# Altium PCB EVB_PHY_SR8201F_V1.0.0.PcbDoc (part 2 of 2)
Units mil, origin at the board's own origin, x right, y up, seen from the top; angles counter-clockwise.
Board outline 6000 x 4000 mil, 4 copper layers (Top, L2, L3, Bottom), stack 35.4 mil thick; 66 components, 60 nets, 233 pads, 178 vias.
Unrouted connection lines stored in the file: 129.
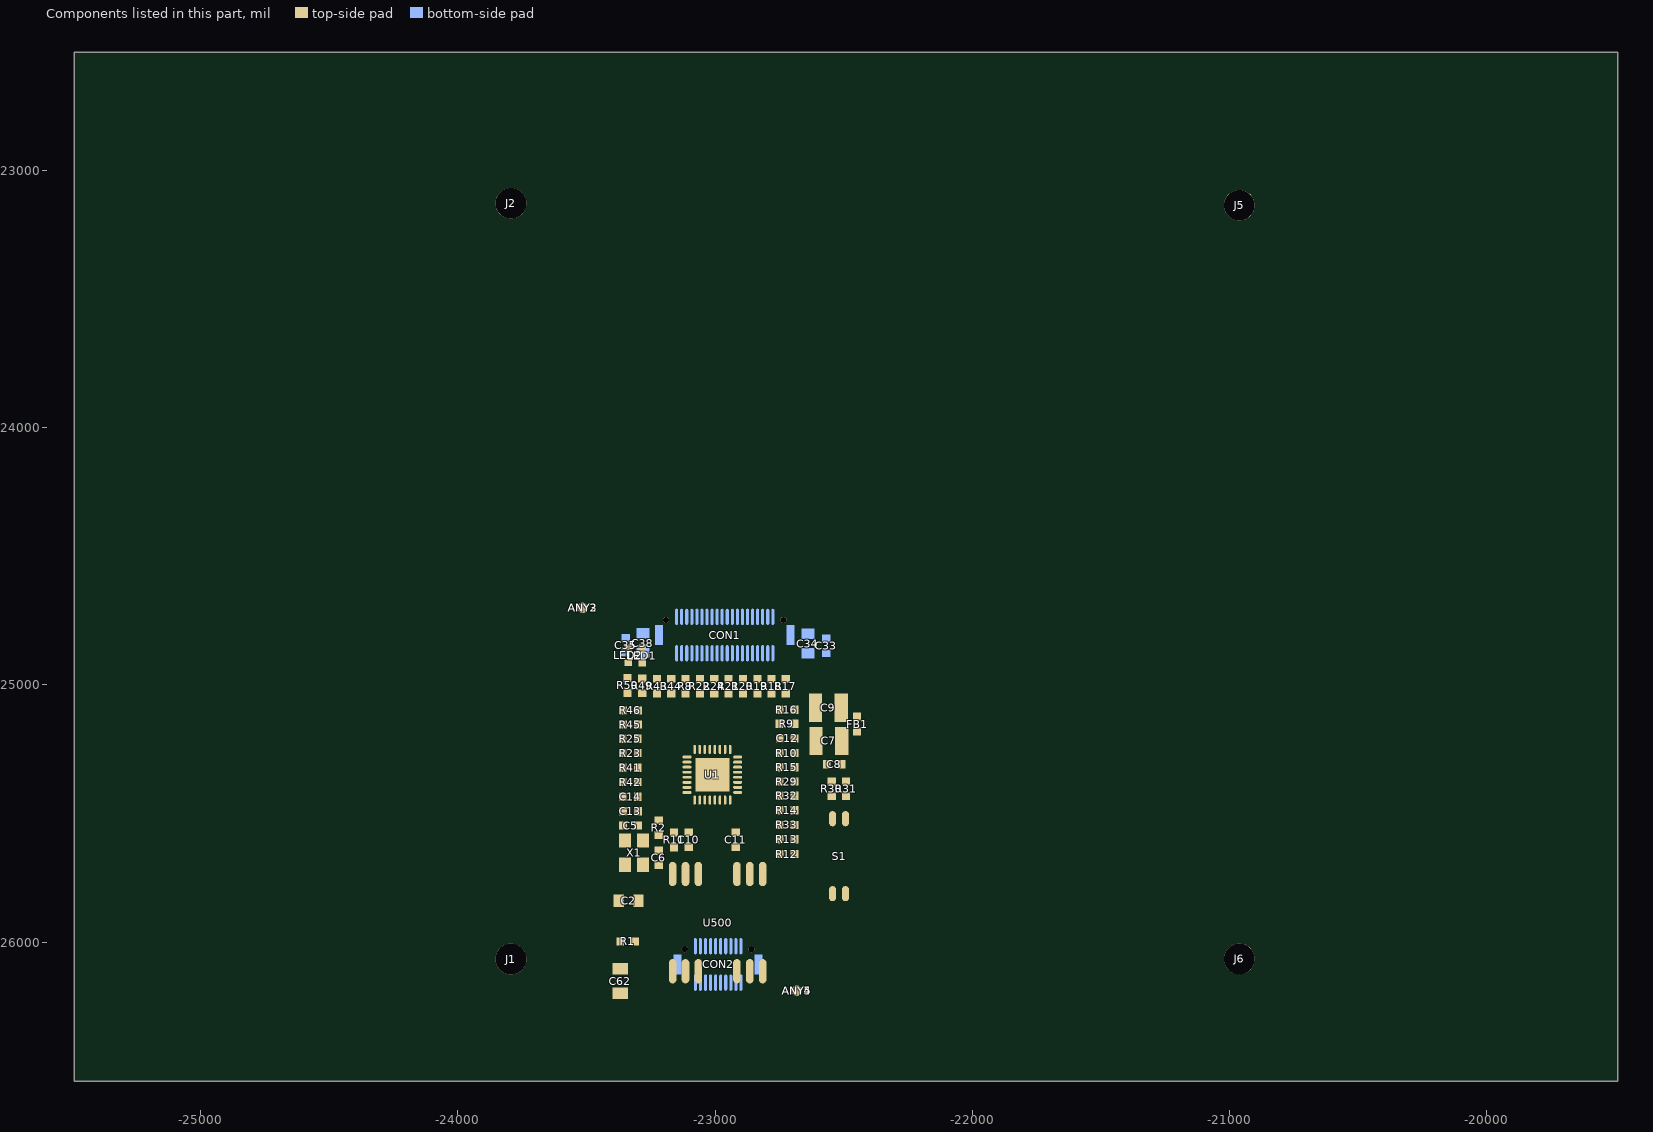
[diagram p4: the components of this part, seen from the top]

## Via types
v1: diameter 16, hole 8, Top to Bottom, 177 vias
v2: diameter 24, hole 16, Top to Bottom, 1 vias

## Nets (pads, with @x,y where several pads share a name; then routed paths per layer and width w, separated by ;. In a path a pad name is that pad's centre, name@x,y a point inside that pad or via, vN(x,y) a via of type N, cw(c..) or ccw(c..) an arc to the next point about the centre after c; other vN are vias at no path point) (continued)
copper on no net: | length 28971
  Top w2: -23690.5,-25160 -23690.5,-25102 ; -23689.5,-25162 -23689.5,-25100 ; -23687.5,-25162 -23687.5,-25100 ; -23684.5,-25158 -23684.5,-25103 ; -23680.5,-25155 -23680.5,-25107 ; -23679.5,-25447 -23679.5,-25435 ; -23679.5,-25350 -23679.5,-25328 ; -23679.5,-25238 -23679.5,-25223 ; -23679.5,-25203 -23679.5,-25178 ; -23679.5,-25153 -23679.5,-25108 ; -23679.5,-25083 -23679.5,-25058 ; -23679.5,-24832 -23679.5,-24820 ; -23677.5,-25452 -23677.5,-25430 ; -23677.5,-25355 -23677.5,-25320 ; -23677.5,-25245 -23677.5,-25220 ; -23677.5,-25205 -23677.5,-25170 ; -23677.5,-25092 -23677.5,-25057 ; -23677.5,-25043 -23677.5,-25017 ; -23677.5,-24937 -23677.5,-24910 ; -23677.5,-24837 -23677.5,-24815 ; -23675.5,-25452 -23675.5,-25430 ; -23675.5,-25357 -23675.5,-25317 ; -23675.5,-25247 -23675.5,-25217 ; -23675.5,-25207 -23675.5,-25170 ; -23675.5,-25150 -23675.5,-25112 ; -23675.5,-25093 -23675.5,-25055 ; -23675.5,-25045 -23675.5,-25015 ; -23675.5,-24940 -23675.5,-24908 ; -23675.5,-24837 -23675.5,-24815 ; -23674.5,-25455 -23674.5,-25427 ; -23674.5,-25358 -23674.5,-25315 ; -23674.5,-25247 -23674.5,-25215 ; -23674.5,-25207 -23674.5,-25167 ; -23674.5,-25095 -23674.5,-25057 ; -23674.5,-25045 -23674.5,-25015 ; -23674.5,-24943 -23674.5,-24910 ; -23674.5,-24840 -23674.5,-24812 ; -23672.5,-25457 -23672.5,-25425 ; -23672.5,-25360 -23672.5,-25313 ; -23672.5,-25248 -23672.5,-25215 ; -23672.5,-25205 -23672.5,-25165 ; -23672.5,-25147 -23672.5,-25115 ; -23672.5,-25097 -23672.5,-25057 ; -23672.5,-25045 -23672.5,-25013 ; -23672.5,-24945 -23672.5,-24908 ; -23672.5,-24842 -23672.5,-24810 ; -23670.5,-25458 -23670.5,-25423 ; -23670.5,-25360 -23670.5,-25312 ; -23670.5,-25248 -23670.5,-25215 ; -23670.5,-25203 -23670.5,-25163 ; -23670.5,-25145 -23670.5,-25117 ; -23670.5,-25098 -23670.5,-25058 ; -23670.5,-25047 -23670.5,-25013 ; -23670.5,-24948 -23670.5,-24910 ; -23670.5,-24843 -23670.5,-24810 ; -23669.5,-25458 -23669.5,-25423 ; -23669.5,-25360 -23669.5,-25310 ; -23669.5,-25248 -23669.5,-25215 ; -23669.5,-25202 -23669.5,-25162 ; -23669.5,-25100 -23669.5,-25060 ; -23669.5,-25047 -23669.5,-25012 ; -23669.5,-24952 -23669.5,-24912 ; -23669.5,-24843 -23669.5,-24808 ; -23667.5,-25460 -23667.5,-25422 ; -23667.5,-25360 -23667.5,-25308 ; -23667.5,-25248 -23667.5,-25215 ; -23667.5,-25200 -23667.5,-25160 ; -23667.5,-25142 -23667.5,-25120 ; -23667.5,-25102 -23667.5,-25062 ; -23667.5,-25047 -23667.5,-25012 ; -23667.5,-24955 -23667.5,-24912 ; -23667.5,-24845 -23667.5,-24807 ; -23665.5,-25460 -23665.5,-25420 ; -23665.5,-25360 -23665.5,-25307 ; -23665.5,-25248 -23665.5,-25215 ; -23665.5,-25198 -23665.5,-25158 ; -23665.5,-25103 -23665.5,-25063 ; -23665.5,-25047 -23665.5,-25012 ; -23665.5,-24958 -23665.5,-24915 ; -23665.5,-24847 -23665.5,-24807 ; -23664.5,-25462 -23664.5,-25420 ; -23664.5,-25360 -23664.5,-25305 ; -23664.5,-25248 -23664.5,-25215 ; -23664.5,-25197 -23664.5,-25157 ; -23664.5,-25138 -23664.5,-25123 ; -23664.5,-25105 -23664.5,-25065 ; -23664.5,-25047 -23664.5,-25012 ; -23664.5,-24962 -23664.5,-24918 ; -23664.5,-24847 -23664.5,-24805 ; -23662.5,-25463 -23662.5,-25418 ; -23662.5,-25360 -23662.5,-25303 ; -23662.5,-25248 -23662.5,-25215 ; -23662.5,-25193 -23662.5,-25155 ; -23662.5,-25107 -23662.5,-25068 ; -23662.5,-25047 -23662.5,-25012 ; -23662.5,-24965 -23662.5,-24922 ; -23662.5,-24848 -23662.5,-24803 ; -23660.5,-25463 -23660.5,-25418 ; -23660.5,-25360 -23660.5,-25302 ; -23660.5,-25248 -23660.5,-25215 ; -23660.5,-25193 -23660.5,-25153 ; -23660.5,-25108 -23660.5,-25070 ; -23660.5,-25047 -23660.5,-25012 ; -23660.5,-24968 -23660.5,-24925 ; -23660.5,-24850 -23660.5,-24803 ; -23659.5,-25465 -23659.5,-25417 ; -23659.5,-25360 -23659.5,-25300 ; -23659.5,-25248 -23659.5,-25215 ; -23659.5,-25192 -23659.5,-25152 ; -23659.5,-25133 -23659.5,-25128 ; -23659.5,-25110 -23659.5,-25070 ; -23659.5,-25047 -23659.5,-25012 ; -23659.5,-24972 -23659.5,-24927 ; -23659.5,-24850 -23659.5,-24802 ; -23657.5,-25467 -23657.5,-25415 ; -23657.5,-25360 -23657.5,-25298 ; -23657.5,-25248 -23657.5,-25215 ; -23657.5,-25190 -23657.5,-25150 ; -23657.5,-25112 -23657.5,-25072 ; -23657.5,-25047 -23657.5,-25012 ; -23657.5,-24975 -23657.5,-24930 ; -23657.5,-24852 -23657.5,-24802 ; -23655.5,-25467 -23655.5,-25415 ; -23655.5,-25360 -23655.5,-25297 ; -23655.5,-25248 -23655.5,-25215 ; -23655.5,-25188 -23655.5,-25147 ; -23655.5,-25115 -23655.5,-25073 ; -23655.5,-25047 -23655.5,-25012 ; -23655.5,-24977 -23655.5,-24933 ; -23655.5,-24853 -23655.5,-24800 ; -23654.5,-25468 -23654.5,-25413 ; -23654.5,-25360 -23654.5,-25297 ; -23654.5,-25248 -23654.5,-25215 ; -23654.5,-25187 -23654.5,-25145 ; -23654.5,-25117 -23654.5,-25075 ; -23654.5,-25047 -23654.5,-25012 ; -23654.5,-24980 -23654.5,-24937 ; -23654.5,-24853 -23654.5,-24798 ; -23652.5,-25470 -23652.5,-25412 ; -23652.5,-25360 -23652.5,-25295 ; -23652.5,-25248 -23652.5,-25215 ; -23652.5,-25185 -23652.5,-25143 ; -23652.5,-25118 -23652.5,-25077 ; -23652.5,-25047 -23652.5,-25012 ; -23652.5,-24983 -23652.5,-24940 ; -23652.5,-24855 -23652.5,-24798 ; -23650.5,-25470 -23650.5,-25412 ; -23650.5,-25360 -23650.5,-25293 ; -23650.5,-25248 -23650.5,-25215 ; -23650.5,-25183 -23650.5,-25142 ; -23650.5,-25120 -23650.5,-25078 ; -23650.5,-25047 -23650.5,-25012 ; -23650.5,-24987 -23650.5,-24943 ; -23650.5,-24855 -23650.5,-24797 ; -23649.5,-25472 -23649.5,-25410 ; -23649.5,-25360 -23649.5,-25292 ; -23649.5,-25248 -23649.5,-25215 ; -23649.5,-25182 -23649.5,-25142 ; -23649.5,-25122 -23649.5,-25080 ; -23649.5,-25047 -23649.5,-25012 ; -23649.5,-24990 -23649.5,-24947 ; -23649.5,-24857 -23649.5,-24795 ; -23647.5,-25473 -23647.5,-25408 ; -23647.5,-25360 -23647.5,-25290 ; -23647.5,-25248 -23647.5,-25215 ; -23647.5,-25180 -23647.5,-25138 ; -23647.5,-25123 -23647.5,-25082 ; -23647.5,-25047 -23647.5,-25012 ; -23647.5,-24993 -23647.5,-24950 ; -23647.5,-24858 -23647.5,-24795 ; -23645.5,-25473 -23645.5,-25408 ; -23645.5,-25360 -23645.5,-25288 ; -23645.5,-25248 -23645.5,-25215 ; -23645.5,-25178 -23645.5,-25137 ; -23645.5,-25125 -23645.5,-25083 ; -23645.5,-25047 -23645.5,-25012 ; -23645.5,-24997 -23645.5,-24953 ; -23645.5,-24858 -23645.5,-24793 ; -23644.5,-25475 -23644.5,-25407 ; -23644.5,-25360 -23644.5,-25327 ; -23644.5,-25325 -23644.5,-25287 ; -23644.5,-25248 -23644.5,-25215 ; -23644.5,-25177 -23644.5,-25135 ; -23644.5,-25127 -23644.5,-25085 ; -23644.5,-25047 -23644.5,-25012 ; -23644.5,-25000 -23644.5,-24955 ; -23644.5,-24860 -23644.5,-24792 ; -23642.5,-25477 -23642.5,-25405 ; -23642.5,-25360 -23642.5,-25327 ; -23642.5,-25323 -23642.5,-25285 ; -23642.5,-25248 -23642.5,-25215 ; -23642.5,-25175 -23642.5,-25133 ; -23642.5,-25128 -23642.5,-25087 ; -23642.5,-25047 -23642.5,-25013 ; -23642.5,-25002 -23642.5,-24958 ; -23642.5,-24862 -23642.5,-24792 ; -23640.5,-25477 -23640.5,-25405 ; -23640.5,-25360 -23640.5,-25327 ; -23640.5,-25322 -23640.5,-25283 ; -23640.5,-25248 -23640.5,-25215 ; -23640.5,-25173 -23640.5,-25132 ; -23640.5,-25130 -23640.5,-25088 ; -23640.5,-25047 -23640.5,-25013 ; -23640.5,-25005 -23640.5,-24962 ; -23640.5,-24862 -23640.5,-24790 ; -23639.5,-25478 -23639.5,-25442 ; -23639.5,-25438 -23639.5,-25403 ; -23639.5,-25360 -23639.5,-25327 ; -23639.5,-25320 -23639.5,-25282 ; -23639.5,-25248 -23639.5,-25215 ; -23639.5,-25172 -23639.5,-25090 ; -23639.5,-25047 -23639.5,-25013 ; -23639.5,-25008 -23639.5,-24965 ; -23639.5,-24863 -23639.5,-24827 ; -23639.5,-24825 -23639.5,-24788 ; -23637.5,-25480 -23637.5,-25443 ; -23637.5,-25438 -23637.5,-25402 ; -23637.5,-25360 -23637.5,-25327 ; -23637.5,-25318 -23637.5,-25280 ; -23637.5,-25248 -23637.5,-25215 ; -23637.5,-25170 -23637.5,-25092 ; -23637.5,-25047 -23637.5,-24967 ; -23637.5,-24865 -23637.5,-24828 ; -23637.5,-24823 -23637.5,-24788 ; -23635.5,-25480 -23635.5,-25445 ; -23635.5,-25437 -23635.5,-25402 ; -23635.5,-25360 -23635.5,-25327 ; -23635.5,-25317 -23635.5,-25278 ; -23635.5,-25248 -23635.5,-25215 ; -23635.5,-25168 -23635.5,-25093 ; -23635.5,-25047 -23635.5,-24967 ; -23635.5,-24865 -23635.5,-24830 ; -23635.5,-24822 -23635.5,-24787 ; -23634.5,-25482 -23634.5,-25445 ; -23634.5,-25437 -23634.5,-25402 ; -23634.5,-25360 -23634.5,-25327 ; -23634.5,-25315 -23634.5,-25275 ; -23634.5,-25248 -23634.5,-25215 ; -23634.5,-25167 -23634.5,-25095 ; -23634.5,-25047 -23634.5,-24963 ; -23634.5,-24867 -23634.5,-24830 ; -23634.5,-24822 -23634.5,-24785 ; -23632.5,-25482 -23632.5,-25447 ; -23632.5,-25435 -23632.5,-25398 ; -23632.5,-25360 -23632.5,-25327 ; -23632.5,-25313 -23632.5,-25273 ; -23632.5,-25248 -23632.5,-25215 ; -23632.5,-25165 -23632.5,-25097 ; -23632.5,-25047 -23632.5,-24962 ; -23632.5,-24868 -23632.5,-24832 ; -23632.5,-24820 -23632.5,-24785 ; -23630.5,-25483 -23630.5,-25448 ; -23630.5,-25433 -23630.5,-25398 ; -23630.5,-25360 -23630.5,-25327 ; -23630.5,-25312 -23630.5,-25272 ; -23630.5,-25248 -23630.5,-25215 ; -23630.5,-25163 -23630.5,-25098 ; -23630.5,-25047 -23630.5,-24962 ; -23630.5,-24868 -23630.5,-24833 ; -23630.5,-24818 -23630.5,-24785 ; -23629.5,-25485 -23629.5,-25448 ; -23629.5,-25433 -23629.5,-25398 ; -23629.5,-25360 -23629.5,-25327 ; -23629.5,-25310 -23629.5,-25270 ; -23629.5,-25248 -23629.5,-25215 ; -23629.5,-25162 -23629.5,-25100 ; -23629.5,-25047 -23629.5,-24960 ; -23629.5,-24868 -23629.5,-24833 ; -23629.5,-24818 -23629.5,-24782 ; -23627.5,-25485 -23627.5,-25450 ; -23627.5,-25432 -23627.5,-25395 ; -23627.5,-25360 -23627.5,-25327 ; -23627.5,-25308 -23627.5,-25268 ; -23627.5,-25248 -23627.5,-25215 ; -23627.5,-25160 -23627.5,-25102 ; -23627.5,-25047 -23627.5,-24957 ; -23627.5,-24872 -23627.5,-24835 ; -23627.5,-24817 -23627.5,-24782 ; -23625.5,-25487 -23625.5,-25452 ; -23625.5,-25430 -23625.5,-25395 ; -23625.5,-25360 -23625.5,-25327 ; -23625.5,-25307 -23625.5,-25267 ; -23625.5,-25248 -23625.5,-25215 ; -23625.5,-25158 -23625.5,-25103 ; -23625.5,-25047 -23625.5,-24953 ; -23625.5,-24872 -23625.5,-24837 ; -23625.5,-24815 -23625.5,-24782 ; -23624.5,-25488 -23624.5,-25453 ; -23624.5,-25430 -23624.5,-25393 ; -23624.5,-25360 -23624.5,-25327 ; -23624.5,-25305 -23624.5,-25265 ; -23624.5,-25248 -23624.5,-25215 ; -23624.5,-25157 -23624.5,-25105 ; -23624.5,-25047 -23624.5,-24952 ; -23624.5,-24872 -23624.5,-24837 ; -23624.5,-24815 -23624.5,-24778 ; -23622.5,-25488 -23622.5,-25453 ; -23622.5,-25428 -23622.5,-25393 ; -23622.5,-25360 -23622.5,-25327 ; -23622.5,-25303 -23622.5,-25263 ; -23622.5,-25248 -23622.5,-25215 ; -23622.5,-25155 -23622.5,-25107 ; -23622.5,-25047 -23622.5,-25000 ; -23622.5,-24993 -23622.5,-24952 ; -23622.5,-24875 -23622.5,-24838 ; -23622.5,-24813 -23622.5,-24778 ; -23620.5,-25488 -23620.5,-25453 ; -23620.5,-25427 -23620.5,-25392 ; -23620.5,-25360 -23620.5,-25327 ; -23620.5,-25302 -23620.5,-25262 ; -23620.5,-25248 -23620.5,-25215 ; -23620.5,-25153 -23620.5,-25108 ; -23620.5,-25047 -23620.5,-25003 ; -23620.5,-24990 -23620.5,-24950 ; -23620.5,-24875 -23620.5,-24840 ; -23620.5,-24812 -23620.5,-24777 ; -23619.5,-25492 -23619.5,-25457 ; -23619.5,-25427 -23619.5,-25390 ; -23619.5,-25360 -23619.5,-25327 ; -23619.5,-25300 -23619.5,-25260 ; -23619.5,-25248 -23619.5,-25215 ; -23619.5,-25152 -23619.5,-25110 ; -23619.5,-25047 -23619.5,-25007 ; -23619.5,-24988 -23619.5,-24947 ; -23619.5,-24877 -23619.5,-24840 ; -23619.5,-24812 -23619.5,-24775 ; -23617.5,-25492 -23617.5,-25457 ; -23617.5,-25425 -23617.5,-25390 ; -23617.5,-25360 -23617.5,-25327 ; -23617.5,-25298 -23617.5,-25258 ; -23617.5,-25248 -23617.5,-25215 ; -23617.5,-25150 -23617.5,-25112 ; -23617.5,-25047 -23617.5,-25008 ; -23617.5,-24988 -23617.5,-24945 ; -23617.5,-24878 -23617.5,-24842 ; -23617.5,-24810 -23617.5,-24775 ; -23615.5,-25493 -23615.5,-25457 ; -23615.5,-25423 -23615.5,-25388 ; -23615.5,-25360 -23615.5,-25327 ; -23615.5,-25297 -23615.5,-25257 ; -23615.5,-25248 -23615.5,-25215 ; -23615.5,-25148 -23615.5,-25113 ; -23615.5,-25047 -23615.5,-25012 ; -23615.5,-24987 -23615.5,-24942 ; -23615.5,-24878 -23615.5,-24843 ; -23615.5,-24808 -23615.5,-24773 ; -23614.5,-25495 -23614.5,-25458 ; -23614.5,-25423 -23614.5,-25387 ; -23614.5,-25360 -23614.5,-25327 ; -23614.5,-25295 -23614.5,-25257 ; -23614.5,-25248 -23614.5,-25215 ; -23614.5,-25147 -23614.5,-25115 ; -23614.5,-25047 -23614.5,-25013 ; -23614.5,-24983 -23614.5,-24940 ; -23614.5,-24880 -23614.5,-24843 ; -23614.5,-24808 -23614.5,-24772 ; -23612.5,-25495 -23612.5,-25460 ; -23612.5,-25422 -23612.5,-25387 ; -23612.5,-25360 -23612.5,-25327 ; -23612.5,-25293 -23612.5,-25255 ; -23612.5,-25248 -23612.5,-25215 ; -23612.5,-25147 -23612.5,-25115 ; -23612.5,-25047 -23612.5,-25013 ; -23612.5,-24982 -23612.5,-24938 ; -23612.5,-24882 -23612.5,-24845 ; -23612.5,-24807 -23612.5,-24772 ; -23610.5,-25495 -23610.5,-25460 ; -23610.5,-25420 -23610.5,-25385 ; -23610.5,-25360 -23610.5,-25327 ; -23610.5,-25292 -23610.5,-25253 ; -23610.5,-25248 -23610.5,-25215 ; -23610.5,-25147 -23610.5,-25115 ; -23610.5,-25047 -23610.5,-25013 ; -23610.5,-24980 -23610.5,-24938 ; -23610.5,-24882 -23610.5,-24847 ; -23610.5,-24807 -23610.5,-24770 ; -23609.5,-25498 -23609.5,-25383 ; -23609.5,-25360 -23609.5,-25327 ; -23609.5,-25290 -23609.5,-25250 ; -23609.5,-25248 -23609.5,-25215 ; -23609.5,-25147 -23609.5,-25115 ; -23609.5,-25047 -23609.5,-25013 ; -23609.5,-24978 -23609.5,-24935 ; -23609.5,-24883 -23609.5,-24770 ; -23607.5,-25498 -23607.5,-25383 ; -23607.5,-25360 -23607.5,-25327 ; -23607.5,-25288 -23607.5,-25215 ; -23607.5,-25147 -23607.5,-25115 ; -23607.5,-25047 -23607.5,-25012 ; -23607.5,-24977 -23607.5,-24932 ; -23607.5,-24883 -23607.5,-24768 ; -23605.5,-25498 -23605.5,-25382 ; -23605.5,-25360 -23605.5,-25327 ; -23605.5,-25287 -23605.5,-25215 ; -23605.5,-25147 -23605.5,-25115 ; -23605.5,-25047 -23605.5,-25012 ; -23605.5,-24975 -23605.5,-24930 ; -23605.5,-24885 -23605.5,-24767 ; -23604.5,-25502 -23604.5,-25380 ; -23604.5,-25360 -23604.5,-25327 ; -23604.5,-25285 -23604.5,-25215 ; -23604.5,-25147 -23604.5,-25115 ; -23604.5,-25047 -23604.5,-25012 ; -23604.5,-24972 -23604.5,-24928 ; -23604.5,-24887 -23604.5,-24767 ; -23602.5,-25502 -23602.5,-25380 ; -23602.5,-25360 -23602.5,-25327 ; -23602.5,-25283 -23602.5,-25215 ; -23602.5,-25147 -23602.5,-25115 ; -23602.5,-25047 -23602.5,-25012 ; -23602.5,-24968 -23602.5,-24928 ; -23602.5,-24887 -23602.5,-24765 ; -23600.5,-25502 -23600.5,-25378 ; -23600.5,-25360 -23600.5,-25327 ; -23600.5,-25282 -23600.5,-25215 ; -23600.5,-25147 -23600.5,-25115 ; -23600.5,-25047 -23600.5,-25012 ; -23600.5,-24968 -23600.5,-24925 ; -23600.5,-24888 -23600.5,-24763 ; -23599.5,-25503 -23599.5,-25377 ; -23599.5,-25360 -23599.5,-25327 ; -23599.5,-25280 -23599.5,-25215 ; -23599.5,-25147 -23599.5,-25115 ; -23599.5,-25047 -23599.5,-25012 ; -23599.5,-24967 -23599.5,-24923 ; -23599.5,-24890 -23599.5,-24763 ; -23597.5,-25505 -23597.5,-25377 ; -23597.5,-25360 -23597.5,-25327 ; -23597.5,-25278 -23597.5,-25215 ; -23597.5,-25147 -23597.5,-25115 ; -23597.5,-25047 -23597.5,-25012 ; -23597.5,-24965 -23597.5,-24920 ; -23597.5,-24890 -23597.5,-24762 ; -23595.5,-25507 -23595.5,-25470 ; -23595.5,-25412 -23595.5,-25375 ; -23595.5,-25360 -23595.5,-25327 ; -23595.5,-25277 -23595.5,-25215 ; -23595.5,-25147 -23595.5,-25115 ; -23595.5,-25047 -23595.5,-25012 ; -23595.5,-24963 -23595.5,-24918 ; -23595.5,-24892 -23595.5,-24855 ; -23595.5,-24797 -23595.5,-24760 ; -23594.5,-25507 -23594.5,-25472 ; -23594.5,-25410 -23594.5,-25373 ; -23594.5,-25360 -23594.5,-25327 ; -23594.5,-25275 -23594.5,-25215 ; -23594.5,-25147 -23594.5,-25115 ; -23594.5,-25047 -23594.5,-25012 ; -23594.5,-24960 -23594.5,-24917 ; -23594.5,-24893 -23594.5,-24857 ; -23594.5,-24795 -23594.5,-24760 ; -23592.5,-25508 -23592.5,-25473 ; -23592.5,-25408 -23592.5,-25373 ; -23592.5,-25360 -23592.5,-25327 ; -23592.5,-25273 -23592.5,-25215 ; -23592.5,-25147 -23592.5,-25115 ; -23592.5,-25047 -23592.5,-25012 ; -23592.5,-24958 -23592.5,-24915 ; -23592.5,-24893 -23592.5,-24858 ; -23592.5,-24793 -23592.5,-24758 ; -23590.5,-25510 -23590.5,-25473 ; -23590.5,-25408 -23590.5,-25372 ; -23590.5,-25360 -23590.5,-25327 ; -23590.5,-25272 -23590.5,-25215 ; -23590.5,-25147 -23590.5,-25115 ; -23590.5,-25047 -23590.5,-25012 ; -23590.5,-24955 -23590.5,-24913 ; -23590.5,-24895 -23590.5,-24858 ; -23590.5,-24793 -23590.5,-24757 ; -23589.5,-25510 -23589.5,-25475 ; -23589.5,-25407 -23589.5,-25370 ; -23589.5,-25360 -23589.5,-25327 ; -23589.5,-25268 -23589.5,-25215 ; -23589.5,-25147 -23589.5,-25115 ; -23589.5,-25047 -23589.5,-25012 ; -23589.5,-24955 -23589.5,-24910 ; -23589.5,-24897 -23589.5,-24860 ; -23589.5,-24792 -23589.5,-24757 ; -23587.5,-25512 -23587.5,-25477 ; -23587.5,-25405 -23587.5,-25370 ; -23587.5,-25360 -23587.5,-25327 ; -23587.5,-25267 -23587.5,-25215 ; -23587.5,-25147 -23587.5,-25115 ; -23587.5,-25045 -23587.5,-25012 ; -23587.5,-24953 -23587.5,-24908 ; -23587.5,-24897 -23587.5,-24862 ; -23587.5,-24790 -23587.5,-24755 ; -23585.5,-25513 -23585.5,-25477 ; -23585.5,-25405 -23585.5,-25368 ; -23585.5,-25360 -23585.5,-25327 ; -23585.5,-25265 -23585.5,-25215 ; -23585.5,-25147 -23585.5,-25115 ; -23585.5,-25047 -23585.5,-25012 ; -23585.5,-24950 -23585.5,-24908 ; -23585.5,-24898 -23585.5,-24862 ; -23585.5,-24790 -23585.5,-24753 ; -23584.5,-25513 -23584.5,-25478 ; -23584.5,-25403 -23584.5,-25368 ; -23584.5,-25360 -23584.5,-25327 ; -23584.5,-25263 -23584.5,-25215 ; -23584.5,-25147 -23584.5,-25115 ; -23584.5,-25045 -23584.5,-25013 ; -23584.5,-24948 -23584.5,-24908 ; -23584.5,-24898 -23584.5,-24863 ; -23584.5,-24788 -23584.5,-24753 ; -23582.5,-25515 -23582.5,-25478 ; -23582.5,-25402 -23582.5,-25367 ; -23582.5,-25360 -23582.5,-25327 ; -23582.5,-25262 -23582.5,-25215 ; -23582.5,-25147 -23582.5,-25115 ; -23582.5,-25045 -23582.5,-25013 ; -23582.5,-24945 -23582.5,-24907 ; -23582.5,-24900 -23582.5,-24865 ; -23582.5,-24787 -23582.5,-24753 ; -23580.5,-25515 -23580.5,-25480 ; -23580.5,-25402 -23580.5,-25368 ; -23580.5,-25358 -23580.5,-25328 ; -23580.5,-25258 -23580.5,-25217 ; -23580.5,-25145 -23580.5,-25117 ; -23580.5,-25045 -23580.5,-25015 ; -23580.5,-24945 -23580.5,-24908 ; -23580.5,-24900 -23580.5,-24865 ; -23580.5,-24787 -23580.5,-24752 ; -23579.5,-25513 -23579.5,-25482 ; -23579.5,-25400 -23579.5,-25367 ; -23579.5,-25357 -23579.5,-25328 ; -23579.5,-25257 -23579.5,-25217 ; -23579.5,-25143 -23579.5,-25117 ; -23579.5,-25043 -23579.5,-25015 ; -23579.5,-24942 -23579.5,-24908 ; -23579.5,-24900 -23579.5,-24867 ; -23579.5,-24785 -23579.5,-24753 ; -23577.5,-25512 -23577.5,-25485 ; -23577.5,-25397 -23577.5,-25370 ; -23577.5,-25355 -23577.5,-25332 ; -23577.5,-25253 -23577.5,-25220 ; -23577.5,-25142 -23577.5,-25120 ; -23577.5,-24938 -23577.5,-24910 ; -23577.5,-24897 -23577.5,-24872 ; -23577.5,-24782 -23577.5,-24755 ; -23557.5,-25218 -23557.5,-25217 ; -23557.5,-25127 -23557.5,-25122 ; -23557.5,-25027 -23557.5,-25023 ; -23557.5,-25007 -23557.5,-25005 ; -23557.5,-24987 -23557.5,-24983 ; -23557.5,-24898 -23557.5,-24895 ; -23555.5,-25220 -23555.5,-25215 ; -23555.5,-25140 -23555.5,-25133 ; -23555.5,-25130 -23555.5,-25123 ; -23555.5,-25115 -23555.5,-25113 ; -23555.5,-25103 -23555.5,-25088 ; -23555.5,-25028 -23555.5,-25022 ; -23555.5,-25008 -23555.5,-25003 ; -23555.5,-24988 -23555.5,-24980 ; -23555.5,-24900 -23555.5,-24893 ; -23555.5,-24808 -23555.5,-24807 ; -23555.5,-24805 -23555.5,-24767 ; -23555.5,-24765 -23555.5,-24763 ; -23554.5,-25222 -23554.5,-25213 ; -23554.5,-25142 -23554.5,-25135 ; -23554.5,-25130 -23554.5,-25122 ; -23554.5,-25118 -23554.5,-25112 ; -23554.5,-25107 -23554.5,-25087 ; -23554.5,-25028 -23554.5,-25020 ; -23554.5,-25015 -23554.5,-25013 ; -23554.5,-25008 -23554.5,-25003 ; -23554.5,-24997 -23554.5,-24992 ; -23554.5,-24987 -23554.5,-24980 ; -23554.5,-24898 -23554.5,-24892 ; -23554.5,-24808 -23554.5,-24762 ; -23552.5,-25220 -23552.5,-25212 ; -23552.5,-25142 -23552.5,-25133 ; -23552.5,-25130 -23552.5,-25122 ; -23552.5,-25118 -23552.5,-25110 ; -23552.5,-25105 -23552.5,-25085 ; -23552.5,-25030 -23552.5,-25022 ; -23552.5,-25020 -23552.5,-25013 ; -23552.5,-25008 -23552.5,-25003 ; -23552.5,-24998 -23552.5,-24992 ; -23552.5,-24988 -23552.5,-24980 ; -23552.5,-24900 -23552.5,-24892 ; -23552.5,-24810 -23552.5,-24758 ; -23550.5,-25247 -23550.5,-25192 ; -23550.5,-25142 -23550.5,-25133 ; -23550.5,-25130 -23550.5,-25122 ; -23550.5,-25118 -23550.5,-25110 ; -23550.5,-25107 -23550.5,-25085 ; -23550.5,-25032 -23550.5,-25022 ; -23550.5,-25020 -23550.5,-25013 ; -23550.5,-25008 -23550.5,-25003 ; -23550.5,-24998 -23550.5,-24992 ; -23550.5,-24988 -23550.5,-24982 ; -23550.5,-24922 -23550.5,-24870 ; -23550.5,-24810 -23550.5,-24758 ; -23549.5,-25248 -23549.5,-25188 ; -23549.5,-25142 -23549.5,-25133 ; -23549.5,-25130 -23549.5,-25122 ; -23549.5,-25118 -23549.5,-25110 ; -23549.5,-25107 -23549.5,-25085 ; -23549.5,-25033 -23549.5,-25025 ; -23549.5,-25020 -23549.5,-25013 ; -23549.5,-25008 -23549.5,-25003 ; -23549.5,-24998 -23549.5,-24992 ; -23549.5,-24988 -23549.5,-24972 ; -23549.5,-24923 -23549.5,-24867 ; -23549.5,-24810 -23549.5,-24760 ; -23547.5,-25248 -23547.5,-25187 ; -23547.5,-25142 -23547.5,-25133 ; -23547.5,-25130 -23547.5,-25122 ; -23547.5,-25118 -23547.5,-25110 ; -23547.5,-25107 -23547.5,-25098 ; -23547.5,-25092 -23547.5,-25085 ; -23547.5,-25033 -23547.5,-25025 ; -23547.5,-25020 -23547.5,-25013 ; -23547.5,-25008 -23547.5,-25003 ; -23547.5,-24998 -23547.5,-24992 ; -23547.5,-24988 -23547.5,-24972 ; -23547.5,-24925 -23547.5,-24867 ; -23547.5,-24775 -23547.5,-24762 ; -23545.5,-25248 -23545.5,-25187 ; -23545.5,-25142 -23545.5,-25133 ; -23545.5,-25130 -23545.5,-25122 ; -23545.5,-25118 -23545.5,-25110 ; -23545.5,-25107 -23545.5,-25100 ; -23545.5,-25092 -23545.5,-25085 ; -23545.5,-25033 -23545.5,-25027 ; -23545.5,-25020 -23545.5,-25013 ; -23545.5,-25008 -23545.5,-25003 ; -23545.5,-24998 -23545.5,-24992 ; -23545.5,-24990 -23545.5,-24970 ; -23545.5,-24923 -23545.5,-24867 ; -23545.5,-24777 -23545.5,-24765 ; -23544.5,-25248 -23544.5,-25187 ; -23544.5,-25142 -23544.5,-25133 ; -23544.5,-25130 -23544.5,-25122 ; -23544.5,-25118 -23544.5,-25110 ; -23544.5,-25107 -23544.5,-25100 ; -23544.5,-25092 -23544.5,-25085 ; -23544.5,-25035 -23544.5,-25027 ; -23544.5,-25020 -23544.5,-24992 ; -23544.5,-24990 -23544.5,-24972 ; -23544.5,-24923 -23544.5,-24917 ; -23544.5,-24900 -23544.5,-24892 ; -23544.5,-24875 -23544.5,-24867 ; -23544.5,-24780 -23544.5,-24765 ; -23542.5,-25248 -23542.5,-25240 ; -23542.5,-25195 -23542.5,-25188 ; -23542.5,-25142 -23542.5,-25110 ; -23542.5,-25107 -23542.5,-25100 ; -23542.5,-25092 -23542.5,-25085 ; -23542.5,-25035 -23542.5,-25028 ; -23542.5,-25020 -23542.5,-24992 ; -23542.5,-24990 -23542.5,-24983 ; -23542.5,-24978 -23542.5,-24972 ; -23542.5,-24923 -23542.5,-24917 ; -23542.5,-24898 -23542.5,-24892 ; -23542.5,-24873 -23542.5,-24867 ; -23542.5,-24782 -23542.5,-24770 ; -23540.5,-25248 -23540.5,-25240 ; -23540.5,-25223 -23540.5,-25217 ; -23540.5,-25195 -23540.5,-25188 ; -23540.5,-25142 -23540.5,-25110 ; -23540.5,-25107 -23540.5,-25100 ; -23540.5,-25092 -23540.5,-25085 ; -23540.5,-25023 -23540.5,-25022 ; -23540.5,-25020 -23540.5,-24992 ; -23540.5,-24990 -23540.5,-24983 ; -23540.5,-24978 -23540.5,-24972 ; -23540.5,-24923 -23540.5,-24917 ; -23540.5,-24898 -23540.5,-24892 ; -23540.5,-24873 -23540.5,-24867 ; -23540.5,-24785 -23540.5,-24770 ; -23539.5,-25248 -23539.5,-25242 ; -23539.5,-25225 -23539.5,-25217 ; -23539.5,-25197 -23539.5,-25188 ; -23539.5,-25142 -23539.5,-25110 ; -23539.5,-25107 -23539.5,-25100 ; -23539.5,-25092 -23539.5,-25085 ; -23539.5,-25025 -23539.5,-25020 ; -23539.5,-25017 -23539.5,-24993 ; -23539.5,-24992 -23539.5,-24983 ; -23539.5,-24978 -23539.5,-24972 ; -23539.5,-24923 -23539.5,-24917 ; -23539.5,-24898 -23539.5,-24892 ; -23539.5,-24873 -23539.5,-24867 ; -23539.5,-24785 -23539.5,-24773 ; -23537.5,-25248 -23537.5,-25240 ; -23537.5,-25225 -23537.5,-25217 ; -23537.5,-25197 -23537.5,-25188 ; -23537.5,-25140 -23537.5,-25113 ; -23537.5,-25107 -23537.5,-25100 ; -23537.5,-25092 -23537.5,-25085 ; -23537.5,-25027 -23537.5,-25020 ; -23537.5,-24992 -23537.5,-24983 ; -23537.5,-24978 -23537.5,-24972 ; -23537.5,-24923 -23537.5,-24917 ; -23537.5,-24898 -23537.5,-24892 ; -23537.5,-24873 -23537.5,-24867 ; -23537.5,-24788 -23537.5,-24777 ; -23535.5,-25247 -23535.5,-25242 ; -23535.5,-25227 -23535.5,-25217 ; -23535.5,-25197 -23535.5,-25188 ; -23535.5,-25107 -23535.5,-25100 ; -23535.5,-25092 -23535.5,-25085 ; -23535.5,-25028 -23535.5,-25020 ; -23535.5,-24992 -23535.5,-24983 ; -23535.5,-24978 -23535.5,-24973 ; -23535.5,-24923 -23535.5,-24917 ; -23535.5,-24900 -23535.5,-24892 ; -23535.5,-24873 -23535.5,-24867 ; -23535.5,-24792 -23535.5,-24778 ; -23534.5,-25247 -23534.5,-25245 ; -23534.5,-25228 -23534.5,-25218 ; -23534.5,-25193 -23534.5,-25192 ; -23534.5,-25107 -23534.5,-25100 ; -23534.5,-25092 -23534.5,-25085 ; -23534.5,-25028 -23534.5,-25022 ; -23534.5,-24993 -23534.5,-24983 ; -23534.5,-24980 -23534.5,-24973 ; -23534.5,-24923 -23534.5,-24867 ; -23534.5,-24792 -23534.5,-24780 ; -23532.5,-25228 -23532.5,-25220 ; -23532.5,-25140 -23532.5,-25113 ; -23532.5,-25107 -23532.5,-25100 ; -23532.5,-25092 -23532.5,-25085 ; -23532.5,-25030 -23532.5,-25022 ; -23532.5,-25020 -23532.5,-24985 ; -23532.5,-24980 -23532.5,-24973 ; -23532.5,-24923 -23532.5,-24867 ; -23532.5,-24790 -23532.5,-24780 ; -23530.5,-25247 -23530.5,-25245 ; -23530.5,-25243 -23530.5,-25233 ; -23530.5,-25232 -23530.5,-25220 ; -23530.5,-25218 -23530.5,-25193 ; -23530.5,-25192 -23530.5,-25188 ; -23530.5,-25142 -23530.5,-25112 ; -23530.5,-25107 -23530.5,-25100 ; -23530.5,-25092 -23530.5,-25085 ; -23530.5,-25030 -23530.5,-25023 ; -23530.5,-25022 -23530.5,-24983 ; -23530.5,-24978 -23530.5,-24973 ; -23530.5,-24923 -23530.5,-24867 ; -23530.5,-24788 -23530.5,-24778 ; -23529.5,-25248 -23529.5,-25187 ; -23529.5,-25143 -23529.5,-25110 ; -23529.5,-25107 -23529.5,-25100 ; -23529.5,-25092 -23529.5,-25085 ; -23529.5,-25032 -23529.5,-25023 ; -23529.5,-25022 -23529.5,-24983 ; -23529.5,-24980 -23529.5,-24973 ; -23529.5,-24923 -23529.5,-24867 ; -23529.5,-24818 -23529.5,-24753 ; -23527.5,-25250 -23527.5,-25185 ; -23527.5,-25143 -23527.5,-25110 ; -23527.5,-25107 -23527.5,-25100 ; -23527.5,-25092 -23527.5,-25085 ; -23527.5,-25033 -23527.5,-25023 ; -23527.5,-25020 -23527.5,-24983 ; -23527.5,-24980 -23527.5,-24973 ; -23527.5,-24923 -23527.5,-24917 ; -23527.5,-24900 -23527.5,-24892 ; -23527.5,-24875 -23527.5,-24867 ; -23527.5,-24818 -23527.5,-24753 ; -23525.5,-25250 -23525.5,-25187 ; -23525.5,-25140 -23525.5,-25110 ; -23525.5,-25107 -23525.5,-25100 ; -23525.5,-25092 -23525.5,-25085 ; -23525.5,-25033 -23525.5,-25023 ; -23525.5,-24995 -23525.5,-24983 ; -23525.5,-24980 -23525.5,-24973 ; -23525.5,-24923 -23525.5,-24917 ; -23525.5,-24898 -23525.5,-24892 ; -23525.5,-24873 -23525.5,-24867 ; -23525.5,-24818 -23525.5,-24753 ; -23524.5,-25247 -23524.5,-25188 ; -23524.5,-25118 -23524.5,-25110 ; -23524.5,-25107 -23524.5,-25100 ; -23524.5,-25092 -23524.5,-25085 ; -23524.5,-25033 -23524.5,-25023 ; -23524.5,-24988 -23524.5,-24982 ; -23524.5,-24980 -23524.5,-24973 ; -23524.5,-24923 -23524.5,-24917 ; -23524.5,-24898 -23524.5,-24892 ; -23524.5,-24873 -23524.5,-24867 ; -23524.5,-24818 -23524.5,-24755 ; -23522.5,-25237 -23522.5,-25227 ; -23522.5,-25205 -23522.5,-25198 ; -23522.5,-25118 -23522.5,-25110 ; -23522.5,-25107 -23522.5,-25100 ; -23522.5,-25092 -23522.5,-25085 ; -23522.5,-25035 -23522.5,-25023 ; -23522.5,-25017 -23522.5,-24998 ; -23522.5,-24988 -23522.5,-24982 ; -23522.5,-24980 -23522.5,-24973 ; -23522.5,-24923 -23522.5,-24917 ; -23522.5,-24898 -23522.5,-24892 ; -23522.5,-24873 -23522.5,-24867 ; -23522.5,-24818 -23522.5,-24817 ; -23522.5,-24815 -23522.5,-24755 ; -23520.5,-25237 -23520.5,-25227 ; -23520.5,-25207 -23520.5,-25198 ; -23520.5,-25118 -23520.5,-25110 ; -23520.5,-25107 -23520.5,-25100 ; -23520.5,-25092 -23520.5,-25085 ; -23520.5,-25033 -23520.5,-25023 ; -23520.5,-25018 -23520.5,-24997 ; -23520.5,-24988 -23520.5,-24973 ; -23520.5,-24923 -23520.5,-24917 ; -23520.5,-24898 -23520.5,-24892 ; -23520.5,-24873 -23520.5,-24867 ; -23520.5,-24783 -23520.5,-24775 ; -23519.5,-25237 -23519.5,-25228 ; -23519.5,-25207 -23519.5,-25198 ; -23519.5,-25140 -23519.5,-25110 ; -23519.5,-25107 -23519.5,-25100 ; -23519.5,-25092 -23519.5,-25085 ; -23519.5,-25030 -23519.5,-25023 ; -23519.5,-25018 -23519.5,-24997 ; -23519.5,-24987 -23519.5,-24975 ; -23519.5,-24923 -23519.5,-24917 ; -23519.5,-24898 -23519.5,-24892 ; -23519.5,-24875 -23519.5,-24867 ; -23519.5,-24783 -23519.5,-24773 ; -23517.5,-25240 -23517.5,-25230 ; -23517.5,-25208 -23517.5,-25200 ; -23517.5,-25140 -23517.5,-25110 ; -23517.5,-25107 -23517.5,-25100 ; -23517.5,-25092 -23517.5,-25085 ; -23517.5,-25080 -23517.5,-25078 ; -23517.5,-25030 -23517.5,-25023 ; -23517.5,-25018 -23517.5,-24997 ; -23517.5,-24987 -23517.5,-24975 ; -23517.5,-24923 -23517.5,-24867 ; -23517.5,-24782 -23517.5,-24773 ; -23515.5,-25240 -23515.5,-25230 ; -23515.5,-25208 -23515.5,-25200 ; -23515.5,-25140 -23515.5,-25112 ; -23515.5,-25108 -23515.5,-25100 ; -23515.5,-25092 -23515.5,-25085 ; -23515.5,-25082 -23515.5,-25078 ; -23515.5,-25030 -23515.5,-25023 ; -23515.5,-25017 -23515.5,-25010 ; -23515.5,-25005 -23515.5,-24997 ; -23515.5,-24987 -23515.5,-24975 ; -23515.5,-24925 -23515.5,-24867 ; -23515.5,-24782 -23515.5,-24773 ; -23514.5,-25240 -23514.5,-25227 ; -23514.5,-25210 -23514.5,-25202 ; -23514.5,-25140 -23514.5,-25112 ; -23514.5,-25108 -23514.5,-25100 ; -23514.5,-25092 -23514.5,-25085 ; -23514.5,-25082 -23514.5,-25078 ; -23514.5,-25030 -23514.5,-25023 ; -23514.5,-25018 -23514.5,-25010 ; -23514.5,-25003 -23514.5,-24997 ; -23514.5,-24995 -23514.5,-24990 ; -23514.5,-24987 -23514.5,-24975 ; -23514.5,-24923 -23514.5,-24867 ; -23514.5,-24782 -23514.5,-24773 ; -23512.5,-25238 -23512.5,-25222 ; -23512.5,-25212 -23512.5,-25202 ; -23512.5,-25140 -23512.5,-25133 ; -23512.5,-25108 -23512.5,-25100 ; -23512.5,-25092 -23512.5,-25085 ; -23512.5,-25082 -23512.5,-25078 ; -23512.5,-25030 -23512.5,-25023 ; -23512.5,-25018 -23512.5,-25010 ; -23512.5,-25003 -23512.5,-24997 ; -23512.5,-24995 -23512.5,-24990 ; -23512.5,-24985 -23512.5,-24977 ; -23512.5,-24922 -23512.5,-24868 ; -23512.5,-24782 -23512.5,-24773 ; -23510.5,-25238 -23510.5,-25215 ; -23510.5,-25212 -23510.5,-25203 ; -23510.5,-25140 -23510.5,-25133 ; -23510.5,-25108 -23510.5,-25102 ; -23510.5,-25092 -23510.5,-25085 ; -23510.5,-25082 -23510.5,-25078 ; -23510.5,-25030 -23510.5,-25023 ; -23510.5,-25018 -23510.5,-25012 ; -23510.5,-25003 -23510.5,-24988 ; -23510.5,-24985 -23510.5,-24977 ; -23510.5,-24900 -23510.5,-24890 ; -23510.5,-24873 -23510.5,-24870 ; -23510.5,-24782 -23510.5,-24773 ; -23509.5,-25233 -23509.5,-25203 ; -23509.5,-25140 -23509.5,-25133 ; -23509.5,-25110 -23509.5,-25102 ; -23509.5,-25092 -23509.5,-25085 ; -23509.5,-25082 -23509.5,-25078 ; -23509.5,-25030 -23509.5,-25023 ; -23509.5,-25018 -23509.5,-25012 ; -23509.5,-25003 -23509.5,-24990 ; -23509.5,-24985 -23509.5,-24977 ; -23509.5,-24898 -23509.5,-24892 ; -23509.5,-24865 -23509.5,-24863 ; -23509.5,-24782 -23509.5,-24773 ; -23507.5,-25228 -23507.5,-25203 ; -23507.5,-25140 -23507.5,-25133 ; -23507.5,-25110 -23507.5,-25102 ; -23507.5,-25092 -23507.5,-25085 ; -23507.5,-25082 -23507.5,-25078 ; -23507.5,-25030 -23507.5,-25023 ; -23507.5,-25018 -23507.5,-25012 ; -23507.5,-25003 -23507.5,-24990 ; -23507.5,-24987 -23507.5,-24977 ; -23507.5,-24898 -23507.5,-24892 ; -23507.5,-24867 -23507.5,-24863 ; -23507.5,-24782 -23507.5,-24773 ; -23505.5,-25223 -23505.5,-25200 ; -23505.5,-25140 -23505.5,-25133 ; -23505.5,-25117 -23505.5,-25113 ; -23505.5,-25110 -23505.5,-25102 ; -23505.5,-25092 -23505.5,-25085 ; -23505.5,-25082 -23505.5,-25078 ; -23505.5,-25030 -23505.5,-25023 ; -23505.5,-25018 -23505.5,-25012 ; -23505.5,-25003 -23505.5,-24993 ; -23505.5,-24988 -23505.5,-24977 ; -23505.5,-24898 -23505.5,-24892 ; -23505.5,-24868 -23505.5,-24862 ; -23505.5,-24783 -23505.5,-24773 ; -23504.5,-25222 -23504.5,-25195 ; -23504.5,-25140 -23504.5,-25133 ; -23504.5,-25123 -23504.5,-25103 ; -23504.5,-25092 -23504.5,-25085 ; -23504.5,-25082 -23504.5,-25078 ; -23504.5,-25030 -23504.5,-25023 ; -23504.5,-25020 -23504.5,-25012 ; -23504.5,-25003 -23504.5,-24993 ; -23504.5,-24988 -23504.5,-24973 ; -23504.5,-24898 -23504.5,-24892 ; -23504.5,-24868 -23504.5,-24862 ; -23504.5,-24785 -23504.5,-24773 ; -23502.5,-25227 -23502.5,-25190 ; -23502.5,-25140 -23502.5,-25103 ; -23502.5,-25092 -23502.5,-25085 ; -23502.5,-25083 -23502.5,-25078 ; -23502.5,-25030 -23502.5,-25023 ; -23502.5,-25020 -23502.5,-25013 ; -23502.5,-25003 -23502.5,-24997 ; -23502.5,-24990 -23502.5,-24972 ; -23502.5,-24900 -23502.5,-24892 ; -23502.5,-24870 -23502.5,-24862 ; -23502.5,-24803 -23502.5,-24797 ; -23502.5,-24788 -23502.5,-24775 ; -23500.5,-25238 -23500.5,-25212 ; -23500.5,-25207 -23500.5,-25187 ; -23500.5,-25140 -23500.5,-25105 ; -23500.5,-25092 -23500.5,-25077 ; -23500.5,-25030 -23500.5,-25023 ; -23500.5,-25020 -23500.5,-25013 ; -23500.5,-25002 -23500.5,-24998 ; -23500.5,-24993 -23500.5,-24983 ; -23500.5,-24980 -23500.5,-24970 ; -23500.5,-24898 -23500.5,-24887 ; -23500.5,-24885 -23500.5,-24877 ; -23500.5,-24875 -23500.5,-24863 ; -23500.5,-24805 -23500.5,-24775 ; -23499.5,-25247 -23499.5,-25215 ; -23499.5,-25202 -23499.5,-25187 ; -23499.5,-25140 -23499.5,-25105 ; -23499.5,-25092 -23499.5,-25078 ; -23499.5,-25030 -23499.5,-25023 ; -23499.5,-25022 -23499.5,-25013 ; -23499.5,-24993 -23499.5,-24985 ; -23499.5,-24980 -23499.5,-24970 ; -23499.5,-24898 -23499.5,-24865 ; -23499.5,-24807 -23499.5,-24778 ; -23497.5,-25250 -23497.5,-25220 ; -23497.5,-25197 -23497.5,-25188 ; -23497.5,-25140 -23497.5,-25120 ; -23497.5,-25113 -23497.5,-25105 ; -23497.5,-25092 -23497.5,-25078 ; -23497.5,-25030 -23497.5,-25023 ; -23497.5,-25022 -23497.5,-25015 ; -23497.5,-24995 -23497.5,-24987 ; -23497.5,-24978 -23497.5,-24972 ; -23497.5,-24897 -23497.5,-24865 ; -23497.5,-24803 -23497.5,-24778 ; -23495.5,-25248 -23495.5,-25228 ; -23495.5,-25193 -23495.5,-25188 ; -23495.5,-25140 -23495.5,-25128 ; -23495.5,-25115 -23495.5,-25107 ; -23495.5,-25090 -23495.5,-25078 ; -23495.5,-25028 -23495.5,-25025 ; -23495.5,-24995 -23495.5,-24990 ; -23495.5,-24977 -23495.5,-24973 ; -23495.5,-24895 -23495.5,-24868 ; -23495.5,-24803 -23495.5,-24782 ; -23494.5,-25247 -23494.5,-25238 ; -23494.5,-25112 -23494.5,-25110 ; -23494.5,-25087 -23494.5,-25082 ; -23494.5,-25027 -23494.5,-25025 ; -23494.5,-24993 -23494.5,-24992 ; -23494.5,-24888 -23494.5,-24875 ; -23494.5,-24797 -23494.5,-24787

## Polygon pours and split planes (outlines as drawn)
GND on Bottom (solid, remove dead copper, pour order 0): -22390,-26255 -23690,-26255 -23690,-24610 -22390,-24610
GND on L2 (solid, remove dead copper, pour order 1): -23690,-24610 -22390,-24610 -22390,-26255 -23690,-26255
GND on L3 (solid, remove dead copper, pour order 2): -23690.5,-24611.5 -22390.5,-24611.5 -22390.5,-26256.5 -23690.5,-26256.5
GND on Top (solid, remove dead copper, pour order 3): -23691.5,-24612 -22391.5,-24612 -22391.5,-26257 -23691.5,-26257

## Keep-outs
Top:
  region: -22880,-25221 -23138,-25221 -23138,-25476 -22880,-25476 -22880,-25221

## Other copper
Top:
  region net AVDD33: -22533.5,-25342.5 -22482,-25342.5 -22482,-25196.5 -22431.5,-25196.5 -22431.5,-25162 -22533.5,-25162 -22533.5,-25342.5
  region net 3V3: -22619.5,-24857 -22549,-24857 -22549,-24906 -22484,-24971 -22484,-25106 -22430.5,-25106 -22430.5,-25143.5 -22535,-25143.5 -22535,-25008.5 -22619.5,-24924 -22619.5,-24857
L2:
  region net 3V3: -22555,-24890 -22620,-24890 -22620,-24910 -22555,-24910 -22555,-24890
Bottom:
  region net 3V3: -22549.5,-24908 -22780.5,-24908 -22780.5,-24856.5 -22549.5,-24856.5 -22549.5,-24908
  region net 3V3: -22801.5,-24705 -22768.5,-24705 -22768.5,-24908.5 -22801.5,-24908.5 -22801.5,-24705
  region net WIFI_3V3: -23123,-24907.5 -23364.5,-24907.5 -23364.5,-24856 -23123,-24856 -23123,-24907.5
  region net WIFI_3V3: -23124,-24905.5 -23156.5,-24905.5 -23156.5,-24703 -23124,-24703 -23124,-24905.5
Multi-Layer:
  lines w5: -23700,-26265 -23700,-22935 ; -23700,-26265 -23900,-26265 -23900,-22935 -23700,-22935 ; -23700,-26265 -23700,-24600 ; -23700,-26265 -22381,-26265 ; -23700,-24600 -23700,-22935 ; -23700,-24600 -22381,-24600 ; -23700,-24600 -22381,-24600 ; -23700,-22935 -22381,-22935 ; -22381,-26265 -22381,-24600 ; -22381,-26265 -21062,-26265 ; -22381,-26265 -22381,-24600 ; -22381,-24600 -22381,-22935 ; -22381,-24600 -21062,-24600 ; -22381,-24600 -22381,-22935 ; -22381,-24600 -21062,-24600 ; -22381,-22935 -21062,-22935 ; -21062,-26265 -21062,-24600 ; -21062,-26265 -21062,-22935 ; -21062,-26265 -20862,-26265 -20862,-22935 -21062,-22935 ; -21062,-24600 -21062,-22935
  text "_ _ _ V_CUT" at -22391,-22929 h40 r90
  text "_ _ _ V_CUT" at -21072.5,-22928 h40 r90
  text "_ _ _ V_CUT" at -23709,-22929.5 h40 r90
  text "_ _ _ V_CUT" at -23690.5,-26269.5 h40 r270
  text "_ _ _ V_CUT" at -22371,-26269.5 h40 r270
  text "_ _ _ V_CUT" at -21051.5,-26273 h40 r270

## Silkscreen, mask and mechanical layers (free items; w line width, h text height)
Silkscreen Top:
  text "RMII" at -22577.5,-25854.5 h25 r270
  text "MII" at -22491,-25866.5 h25 r270
  text "PBS37E1A1XX" at -23572.5,-26200 h25 r90
  text "EVB_PHY_SR8201F_V1.0.0" at -23622.5,-26202.5 h25 r90
  text "2020/11/3" at -23522.5,-26202.5 h25 r90
  text "AnyCloud" at -23450,-26202.5 h40 r90